# Altium PCB glasses_full_v1_small.PcbDoc (part 1 of 2)
Units mil, origin at the board's own origin, x right, y up, seen from the top; angles counter-clockwise.
Board outline 5946.88 x 2377.05 mil, 2 copper layers (Top Layer, Bottom Layer); 34 components, 50 nets, 179 pads, 116 vias.
Unrouted connection lines stored in the file: 2.
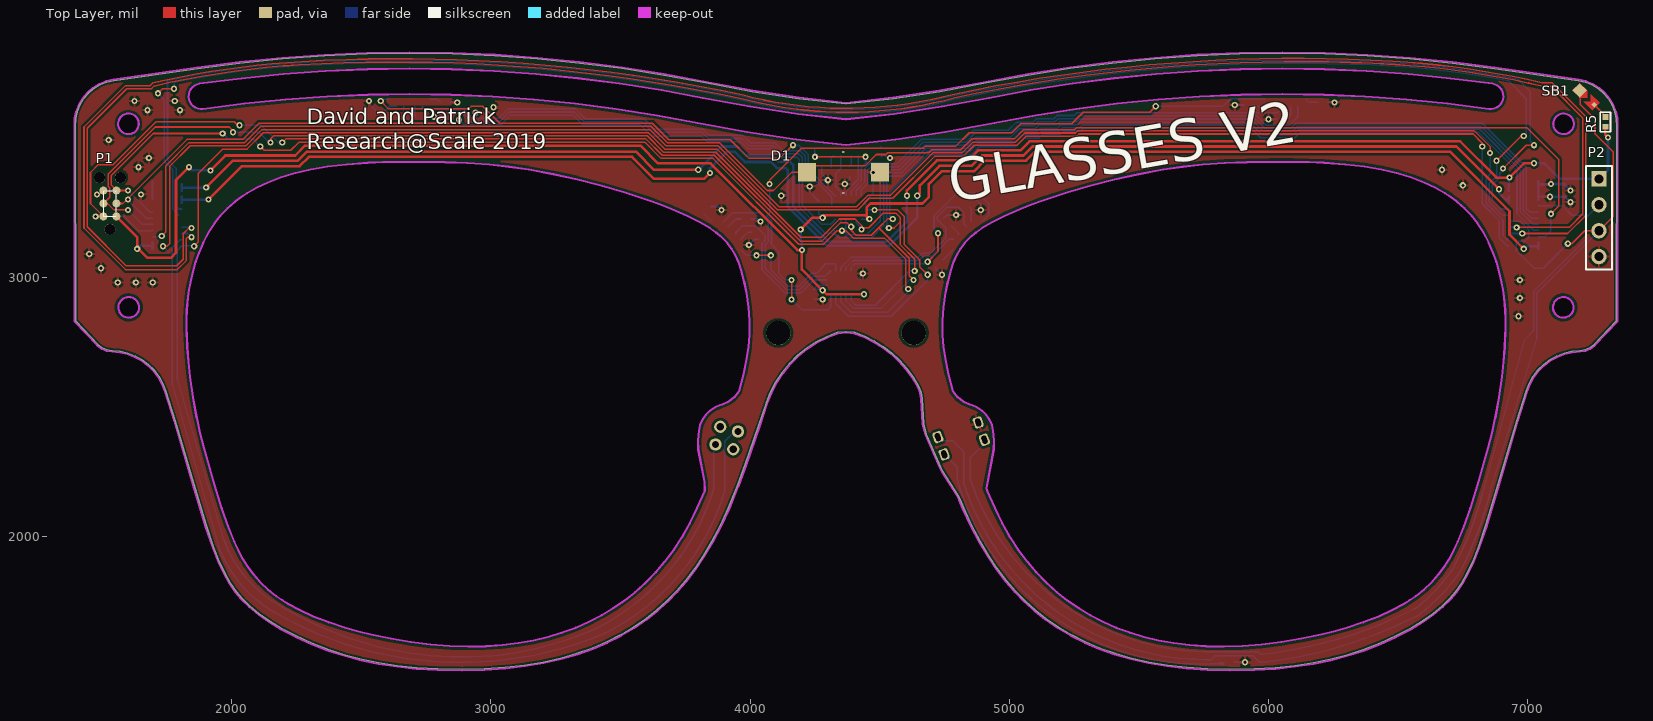
[diagram p0: Top Layer view]
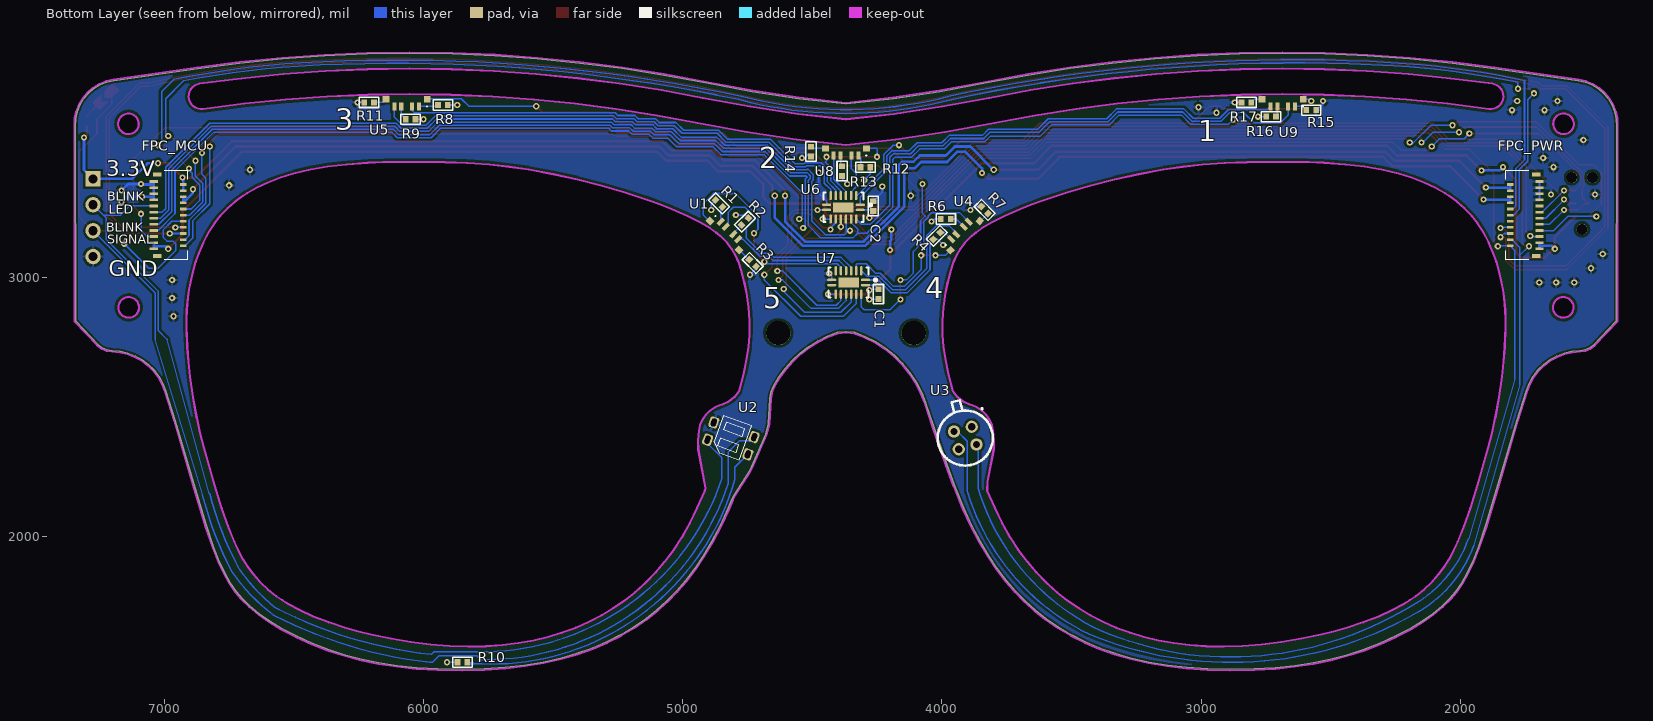
[diagram p1: Bottom Layer view, seen from below]
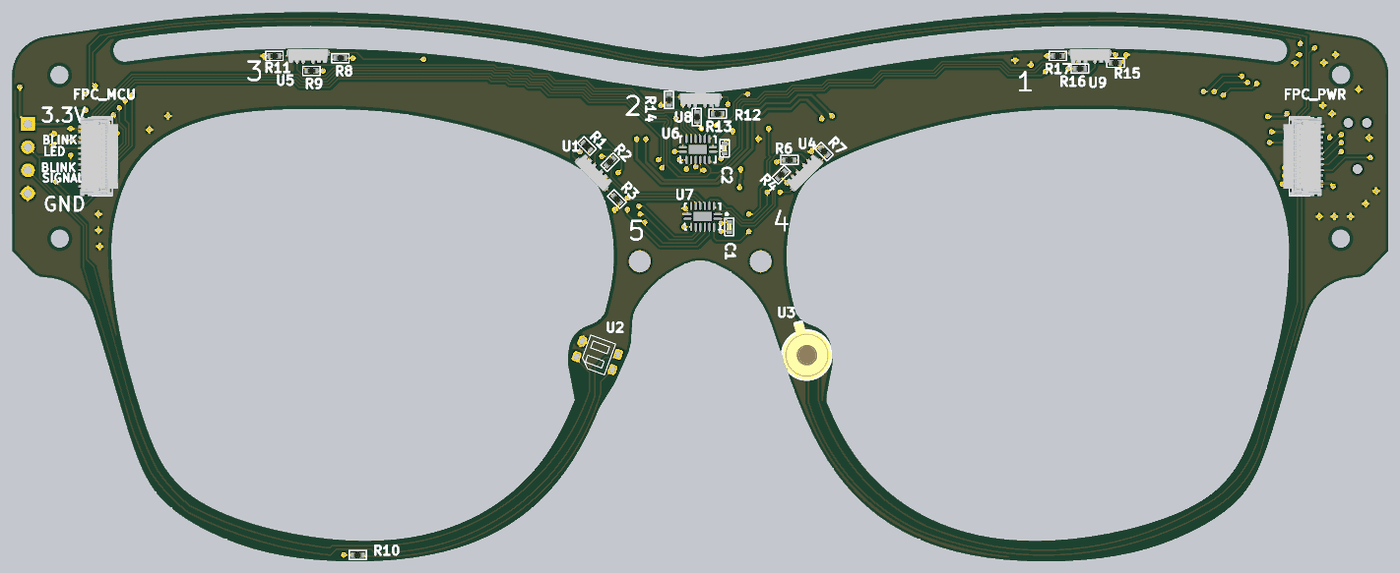
[diagram p3: 3D render of the assembled board from below, using the file's embedded part models]

## Layer stack, top to bottom
Top Solder: solder mask 0.4, Solder Resist, Dk 3.5
Top Layer: signal copper 1.4
Dielectric 1: dielectric 12.6, FR-4, Dk 4.8
Bottom Layer: signal copper 1.4
Bottom Solder: solder mask 0.4, Solder Resist, Dk 3.5

## Board outline
4669.9,2434.82 4679.73,2394.57 4736.2,2266.78 4744.2,2251.72 4801.12,2161.04 4810.39,2143.01 4823.78,2110.32 4855.98,2040.92 4888.05,1979.95 4920.73,1925.09 4954.19,1875.48 4988.54,1830.55 5024.15,1789.44 5061.73,1751.08 5101.06,1715.62 5141.96,1683.2 5189.62,1650.28 5240.15,1620.26 5293.21,1593.39 5348.39,1569.9 5407.37,1549.08 5470.39,1531 5537.7,1515.76 5608.98,1503.64 5684.52,1494.77 5765.01,1489.24 5851.41,1487.18 5945.19,1488.84 6027.03,1493.75 6102.3,1501.66 6172.6,1512.43 6238.36,1525.89 6300.02,1541.92 6365.01,1562.79 6429.36,1587.67 6492.87,1616.52 6546.87,1644.94 6593.39,1673.3 6634.26,1702.21 6670.5,1732.04 6699.72,1760.63 6722.62,1787.84 6745.54,1820.98 6767.03,1858.85 6787.62,1902.82 6808.73,1956.41 6838.86,2044.54 6881.55,2185.41 6957.86,2445.76 6994.14,2561.62 7005.36,2590.29 7020.44,2617.12 7039.09,2641.61 7060.96,2663.28 7085.61,2681.71 7112.58,2696.55 7141.35,2707.51 7171.36,2714.37 7202.02,2717.02 7221.96,2719.96 7240.46,2727.93 7256.3,2740.4 7342.25,2831.62 7343.44,3583.93 7342.03,3611.7 7336.17,3638.87 7325.99,3664.74 7311.78,3688.63 7293.89,3709.91 7272.81,3728.02 7249.08,3742.5 7223.33,3752.96 7196.22,3759.13 6872.6,3805.63 6709.64,3826.68 6546.14,3843.08 6382.25,3854.81 6218.08,3861.86 6053.78,3864.22 5889.48,3861.91 5725.32,3854.91 5561.41,3843.23 5397.91,3826.89 5234.95,3805.89 5072.64,3780.25 4911.13,3750 4731.71,3716.91 4551.26,3689.98 4370,3669.21 4188.74,3689.97 4008.29,3716.91 3828.86,3750 3667.36,3780.25 3505.05,3805.89 3342.08,3826.89 3178.58,3843.23 3014.68,3854.91 2850.52,3861.91 2686.22,3864.22 2521.92,3861.86 2357.75,3854.8 2193.86,3843.08 2030.36,3826.68 1867.4,3805.63 1543.77,3759.13 1516.67,3752.96 1490.92,3742.5 1467.19,3728.02 1446.1,3709.91 1428.22,3688.62 1414.01,3664.74 1403.83,3638.87 1397.97,3611.7 1396.56,3583.93 1397.75,2831.62 1483.7,2740.4 1499.53,2727.93 1518.04,2719.96 1537.97,2717.02 1568.64,2714.37 1598.65,2707.51 1627.42,2696.55 1654.39,2681.71 1679.04,2663.28 1700.91,2641.61 1719.56,2617.12 1734.64,2590.29 1745.86,2561.62 1782.14,2445.76 1858.45,2185.41 1901.14,2044.54 1931.27,1956.41 1952.37,1902.82 1972.97,1858.85 1994.46,1820.98 2017.38,1787.84 2040.28,1760.63 2069.5,1732.04 2105.74,1702.21 2146.61,1673.3 2193.13,1644.93 2247.13,1616.52 2310.64,1587.67 2374.99,1562.79 2439.98,1541.92 2501.64,1525.89 2567.39,1512.43 2637.7,1501.66 2712.97,1493.75 2794.81,1488.84 2888.59,1487.18 2974.99,1489.24 3055.48,1494.77 3131.02,1503.64 3202.3,1515.75 3269.61,1530.99 3332.63,1549.08 3391.61,1569.9 3446.79,1593.39 3499.85,1620.26 3550.37,1650.28 3598.04,1683.2 3638.94,1715.62 3678.27,1751.08 3715.85,1789.44 3751.46,1830.55 3785.81,1875.48 3819.27,1925.09 3851.95,1979.95 3884.02,2040.92 3916.22,2110.32 3950.71,2194.53 3982.01,2279.35 4031.79,2424.01 4061.99,2514.48 4078.33,2556.09 4098.9,2595.77 4123.48,2633.11 4151.81,2667.69 4183.57,2699.14 4218.42,2727.12 4255.99,2751.34 4295.88,2771.52 4337.64,2787.45 4370,2790.42 4402.36,2787.45 4441.17,2772.81 4478.39,2754.5 4513.67,2732.69 4546.68,2707.58 4577.12,2679.41 4604.7,2648.43 4629.17,2614.94 4650.3,2579.24 4659.56,2556.1 4663.76,2531.53
cut-out: 4911.65,2186.12 4911.74,2186.59 4940.11,2335.69 4941.44,2371.09 4937.3,2407.61 4932.62,2429.68 4923.83,2450.47 4911.25,2469.2 4895.34,2485.2 4876.67,2497.88 4855.93,2506.78 4847.52,2509.47 4822.32,2520.94 4800.48,2537.96 4783.21,2559.59 4765.92,2624.68 4753.67,2683.78 4746.8,2731.23 4743.07,2779.07 4742.9,2832.07 4746.54,2885.06 4754.23,2940.14 4762.66,2981.49 4773.41,3022.46 4785.5,3058.45 4796.84,3084.37 4810.73,3108.89 4828.79,3133.13 4849.82,3155.06 4871.58,3173.36 4894.65,3189.78 4931.11,3211.76 4981.93,3237.41 5042.9,3263.94 5086.21,3280.85 5129.94,3296.66 5221.99,3326.76 5315.14,3353.67 5406.49,3377.13 5498.51,3397.73 5594.11,3415.53 5669.84,3426.71 5745.84,3435.08 5831.3,3441.15 5917.14,3444.17 6003.06,3445.15 6096.91,3445.23 6155.48,3444.24 6213.97,3442.04 6296.23,3436.17 6369.88,3427.39 6435.6,3416.08 6468.68,3408.85 6501.59,3400.47 6551.51,3385.04 6600.17,3366.27 6642.89,3346.16 6681.08,3324.48 6703,3310 6724.16,3294.27 6755.43,3267.05 6783.87,3237.06 6806.93,3207.82 6829.69,3172.86 6849.83,3134.7 6867.09,3093.63 6878.99,3058.58 6889.1,3023.18 6899.84,2979.46 6905.25,2951.82 6909.38,2923.91 6913.62,2872.68 6914.56,2840.48 6914.53,2808.21 6911.66,2731.39 6907.42,2673.87 6901.52,2616.67 6890.08,2536.86 6874.97,2457.61 6861.75,2399.73 6847.13,2342.18 6812.74,2218.97 6778.66,2109.56 6752.68,2035.16 6730.43,1980.21 6709.47,1936.27 6695.98,1911.78 6681.18,1887.93 6656.32,1853.9 6628.4,1822.3 6600.55,1795.89 6567.44,1769.66 6545.21,1754.39 6522.26,1740.15 6477.87,1716.08 6425.47,1692.18 6366.19,1669.29 6298.9,1647.39 6251.16,1634.03 6203,1622.1 6126.5,1605.94 6049.38,1593.02 5973.45,1583.62 5899.06,1577.72 5827.94,1575.41 5759.39,1576.54 5695.43,1580.94 5634.28,1588.45 5575.97,1598.92 5519.41,1612.45 5465.33,1628.76 5413.39,1647.87 5359.6,1671.74 5312.6,1696.34 5267.4,1723.66 5224.4,1753.43 5183.93,1785.4 5140.79,1824.34 5104.18,1861.99 5070.03,1901.77 5035.86,1947.32 5003.48,1996.99 4972.93,2050.99 4944.18,2109.56 4914.87,2177.75
cut-out: 3884.07,2506.78 3863.33,2497.88 3844.66,2485.2 3828.75,2469.2 3816.17,2450.47 3807.38,2429.68 3802.7,2407.61 3798.56,2371.09 3799.89,2335.69 3823.59,2211.12 3825.13,2177.75 3795.82,2109.56 3767.07,2050.99 3736.52,1996.99 3704.14,1947.32 3669.97,1901.77 3635.82,1861.99 3599.21,1824.34 3556.07,1785.4 3515.6,1753.43 3472.6,1723.66 3427.4,1696.34 3380.4,1671.74 3326.61,1647.87 3274.67,1628.76 3220.59,1612.45 3164.03,1598.92 3105.72,1588.45 3044.57,1580.94 2980.61,1576.54 2912.06,1575.41 2840.93,1577.72 2766.55,1583.62 2690.62,1593.02 2613.5,1605.94 2537,1622.1 2488.84,1634.03 2441.1,1647.39 2373.81,1669.29 2314.52,1692.18 2262.13,1716.08 2217.74,1740.15 2194.79,1754.39 2172.56,1769.66 2139.45,1795.89 2111.6,1822.3 2083.68,1853.9 2058.82,1887.93 2044.02,1911.78 2030.53,1936.27 2009.57,1980.21 1987.32,2035.16 1961.34,2109.56 1927.26,2218.97 1892.87,2342.18 1878.24,2399.73 1865.03,2457.61 1849.92,2536.86 1838.48,2616.67 1832.58,2673.87 1828.34,2731.39 1825.47,2808.21 1825.44,2840.48 1826.37,2872.68 1830.62,2923.91 1834.75,2951.82 1840.16,2979.46 1850.9,3023.18 1861.01,3058.58 1872.91,3093.63 1890.17,3134.7 1910.31,3172.86 1933.07,3207.82 1956.12,3237.06 1984.57,3267.05 2015.84,3294.27 2036.99,3310 2058.92,3324.48 2097.11,3346.16 2139.83,3366.27 2188.49,3385.04 2238.41,3400.47 2271.31,3408.85 2304.4,3416.08 2370.12,3427.39 2443.76,3436.17 2526.03,3442.04 2584.52,3444.24 2643.09,3445.23 2736.94,3445.15 2822.86,3444.17 2908.7,3441.15 2994.16,3435.08 3070.15,3426.71 3145.89,3415.53 3241.49,3397.73 3333.51,3377.13 3424.86,3353.67 3518.01,3326.76 3610.06,3296.66 3653.79,3280.85 3697.1,3263.94 3758.07,3237.41 3808.89,3211.76 3845.35,3189.78 3868.42,3173.36 3890.18,3155.06 3911.21,3133.13 3929.27,3108.89 3943.16,3084.37 3954.5,3058.45 3966.58,3022.46 3977.34,2981.49 3985.77,2940.14 3993.46,2885.06 3997.09,2832.07 3996.92,2779.07 3993.2,2731.23 3986.33,2683.78 3974.08,2624.68 3956.79,2559.59 3939.52,2537.96 3917.68,2520.94 3892.48,2509.47
cut-out: 1601.46,3632.05 1607.73,3631.55 1613.86,3630.06 1619.66,3627.62 1625.01,3624.29 1629.77,3620.16 1633.82,3615.34 1637.05,3609.93 1639.39,3604.08 1640.77,3597.94 1641.17,3591.65 1640.57,3585.38 1638.99,3579.28 1636.46,3573.51 1633.06,3568.21 1628.86,3563.52 1623.97,3559.54 1618.51,3556.39 1612.63,3554.14 1606.47,3552.85 1600.17,3552.55 1593.91,3553.24 1587.84,3554.91 1582.11,3557.53 1576.86,3561.01 1572.23,3565.28 1568.33,3570.23 1565.26,3575.73 1563.1,3581.65 1561.9,3587.83 1561.69,3594.13 1562.48,3600.38 1564.24,3606.42 1566.94,3612.12 1570.51,3617.31 1574.85,3621.88 1579.85,3625.7 1585.4,3628.69 1591.35,3630.76 1594.89,3631.52 1598.49,3631.95 1599.81,3632.02 1600.63,3632.05
cut-out: 1602.53,2923.81 1608.81,2923.31 1614.93,2921.83 1620.74,2919.39 1626.09,2916.07 1630.85,2911.95 1634.9,2907.13 1638.14,2901.72 1640.49,2895.88 1641.88,2889.73 1642.28,2883.45 1641.69,2877.18 1640.11,2871.08 1637.59,2865.3 1634.19,2860 1630,2855.3 1625.11,2851.32 1619.66,2848.17 1613.78,2845.91 1607.62,2844.61 1601.33,2844.3 1595.06,2844.99 1588.99,2846.66 1583.26,2849.26 1578,2852.74 1573.37,2857.01 1569.46,2861.95 1566.39,2867.45 1564.22,2873.36 1563.02,2879.55 1562.8,2885.84 1563.58,2892.09 1565.34,2898.14 1568.03,2903.84 1571.59,2909.03 1575.93,2913.61 1580.93,2917.43 1586.47,2920.43 1592.42,2922.51 1595.98,2923.27 1599.6,2923.7 1600.9,2923.78 1601.71,2923.8
cut-out: 7138.42,3552.53 7132.14,3553.05 7126.03,3554.56 7120.23,3557.02 7114.89,3560.36 7110.14,3564.5 7106.11,3569.34 7102.9,3574.76 7100.58,3580.62 7099.21,3586.76 7098.83,3593.05 7099.45,3599.32 7101.05,3605.41 7103.59,3611.18 7107.02,3616.47 7111.23,3621.15 7116.13,3625.11 7121.59,3628.24 7127.48,3630.47 7133.65,3631.75 7137.57,3632.04 7141.5,3631.95 7147.73,3630.99 7153.73,3629.06 7159.34,3626.21 7164.44,3622.5 7168.89,3618.04 7172.57,3612.93 7175.41,3607.31 7177.32,3601.3 7178.25,3595.08 7178.19,3588.78 7177.14,3582.57 7175.12,3576.6 7172.19,3571.03 7168.41,3565.99 7163.88,3561.61 7158.72,3558 7153.05,3555.25 7147.02,3553.43 7142.74,3552.75
cut-out: 7137.47,2923.81 7143.75,2923.31 7149.87,2921.83 7155.68,2919.4 7161.04,2916.08 7165.8,2911.95 7169.85,2907.13 7173.09,2901.73 7175.44,2895.88 7176.83,2889.74 7177.23,2883.45 7176.64,2877.18 7175.07,2871.08 7172.55,2865.31 7169.15,2860.01 7164.95,2855.31 7160.07,2851.33 7154.62,2848.17 7148.74,2845.91 7142.57,2844.61 7138.57,2844.3 7134.56,2844.39 7128.33,2845.35 7122.33,2847.28 7116.72,2850.13 7111.62,2853.84 7107.18,2858.3 7103.49,2863.41 7100.66,2869.03 7098.75,2875.03 7097.81,2881.26 7097.87,2887.56 7098.92,2893.77 7100.94,2899.74 7103.88,2905.31 7107.65,2910.35 7112.18,2914.73 7117.35,2918.34 7123.01,2921.09 7129.04,2922.91 7133.23,2923.58
cut-out: 4370,3511.01 4178.27,3532.52 3987.42,3560.74 3797.67,3595.64 3640.57,3625.07 3482.7,3650 3324.19,3670.43 3165.15,3686.32 3005.73,3697.68 2846.05,3704.49 2686.24,3706.74 2526.43,3704.44 2366.75,3697.58 2207.33,3686.17 2048.31,3670.23 1889.8,3649.75 1879.52,3649.36 1869.38,3651.12 1859.83,3654.94 1851.28,3660.67 1844.11,3668.05 1838.63,3676.75 1835.08,3686.41 1833.62,3696.6 1834.31,3706.86 1837.11,3716.76 1841.91,3725.86 1848.5,3733.76 1856.59,3740.12 1865.82,3744.66 1875.8,3747.18 2037.09,3768.01 2198.91,3784.24 2361.13,3795.85 2523.61,3802.82 2686.23,3805.17 2848.84,3802.88 3011.33,3795.95 3173.55,3784.39 3335.37,3768.21 3496.67,3747.43 3657.31,3722.06 3817.17,3692.11 4000.46,3658.35 4184.81,3630.93 4370,3609.88 4555.19,3630.93 4739.54,3658.35 4922.83,3692.11 5082.69,3722.06 5243.33,3747.43 5404.63,3768.21 5566.45,3784.39 5728.67,3795.95 5891.16,3802.88 6053.77,3805.17 6216.39,3802.83 6378.87,3795.85 6541.09,3784.24 6702.91,3768.01 6864.2,3747.18 6874.18,3744.66 6883.41,3740.12 6891.5,3733.76 6898.09,3725.86 6902.89,3716.76 6905.69,3706.86 6906.38,3696.6 6904.92,3686.41 6901.37,3676.76 6895.89,3668.05 6888.72,3660.67 6880.17,3654.94 6870.62,3651.12 6860.48,3649.36 6850.2,3649.75 6691.69,3670.23 6532.66,3686.17 6373.25,3697.58 6213.57,3704.44 6053.76,3706.74 5893.95,3704.49 5734.27,3697.68 5574.84,3686.32 5415.81,3670.43 5257.29,3650 5099.43,3625.07 4942.33,3595.64 4752.58,3560.74 4561.73,3532.52

## Design rules (kind name [scope] priority, off if disabled: settings)
Clearance [All] p1: gap=10 ignorepadtopadclearanceinfootprint=FALSE except(0: Arc-Hole Track-Hole SMDPad-Hole THPad-Hole Via-Hole Fill-Hole Poly-Hole Region-Hole Text-Hole; 6: Arc-Arc Arc-Track Arc-SMDPad Arc-THPad Arc-Via Arc-Fill Track-Track Track-SMDPad Track-THPad Track-Via Track-Fill SMDPad-SMDPad SMDPad-THPad SMDPad-Via SMDPad-Fill THPad-Via THPad-Fill Via-Via Via-Fill Fill-Fill)
PolygonConnect [All] p1: connectstyle=Relief reliefconductorwidth=10 reliefentries=4 polygonreliefangle="90 Angle" airgapwidth=10
RoutingVias [All] p1: holewidth=28 width=50 viastyle="Through Hole" minholewidth=28 minwidth=50 maxholewidth=28 maxwidth=50
SolderMaskExpansion [All] p1: expansion=4
Width [All] p1: maxlimit=12 minlimit=6 preferedwidth=10
30 further rules are at their usual default settings.

## Components (designator, comment, footprint, x,y, rotation, side; value= is the part's Value field where it differs from the comment)
C1 "1µF" 0402C 4245,2935 r270 bottom
C2 "1µF" 0402C 4265,3275 r90 bottom
D1 "VBPW34FASR" VBPW34FAS 4360,3405 r0 top
FPC_MCU "502250-2391" 5022502391 6980,3240 r270 bottom
FPC_PWR "502250-2391" 5022502391 1755,3240 r90 bottom
P1 "Header 3X2" HEADER_PROGRAM_STLINK_SWD 1555,3235 r90 top
P2 "Header 4" HDR1X4 7275,3380 r270 top
R1 "100" 0402R 4860,3285 r45 bottom
R2 "100" 0402R 4760,3215 r135 bottom
R3 "100" 0402R 4730,3055 r225 bottom
R4 "100" 0402R 4020,3160 r315 bottom
R5 "50K" 0402R 7300,3600 r270 top
R6 "100" 0402R 3985,3225 r0 bottom
R7 "100" 0402R 3835,3260 r45 bottom
R8 "100" 0402R 5925,3665 r180 bottom
R9 "100" 0402R 6050,3610 r180 bottom
R10 "100" 0402R 5850,1515 r0 bottom
R11 "100" 0402R 6210,3675 r0 bottom
R12 "100" 0402R 4295,3425 r180 bottom
R13 "100" 0402R 4385,3410 r270 bottom
R14 "100" 0402R 4505,3485 r270 bottom
R15 "100" 0402R 2575,3645 r0 bottom
R16 "100" 0402R 2730,3620 r180 bottom
R17 "100" 0402R 2825,3675 r180 bottom
SB1 "SOLDER_JUMPER" SMD_JUMPER 7230,3720 r315 top
U1 "QLS6B-FKW" QLS6B-FKW 4805,3195 r45 bottom
U2 "QRE1113" QRE1113_DIP 4880,2440 r290 bottom
U3 "ZTP-135SR" ZTP-135SR 3910,2380 r210 bottom
U4 "QLS6B-FKW" QLS6B-FKW 3943.67,3194.16 r315 bottom
U5 "QLS6B-FKW" QLS6B-FKW 6065,3640 r180 bottom
U6 "74HC595BQ,115" "74VHC595 - QFN127P600-8N" 4380,3270 r270 bottom
U7 "74HC595BQ,115" "74VHC595 - QFN127P600-8N" 4360,2980 r270 bottom
U8 "QLS6B-FKW" QLS6B-FKW 4370,3450 r180 bottom
U9 "QLS6B-FKW" QLS6B-FKW 2685,3640 r180 bottom

## Footprints (in the part's own frame and the unit in brackets; to place one, negate y for a bottom-side part, rotate by r counter-clockwise, add the part's x,y. Pads: shape width x height; smd on the part's side, far side on the other; paste and mask are expansions set on the pad)
"74VHC595 - QFN127P600-8N" [mm]
  oval 0.25x0.9 smd: 1(-0.25,1.65) 8(-0.25,-1.65) 9(0.25,-1.65) 16(0.25,1.65)
  oval 0.9x0.25 smd: 2(-1.15,1.25) 3(-1.15,0.75) 4(-1.15,0.25) 5(-1.15,-0.25) 6(-1.15,-0.75) 7(-1.15,-1.25) 10(1.15,-1.25) 11(1.15,-0.75) 12(1.15,-0.25) 13(1.15,0.25) 14(1.15,0.75) 15(1.15,1.25)
  rect 1x2 smd: 17(0,0)
  silkscreen extent -1.45,-1.95 1.45,2.77, body extent -1.3,-1.8 1.3,1.8, height 1
0402C [mm]
  rect 0.559x0.6 smd: 1(-0.48,0) 2(0.48,0)
  silkscreen extent -0.95,-0.5 0.95,0.5, body extent -0.48,-0.25 0.48,0.25, height 0.5
0402R [mm]
  rect 0.559x0.6 smd: 1(-0.48,0) 2(0.48,0)
  silkscreen extent -0.95,-0.5 0.95,0.5, body extent -0.46,-0.25 0.5,0.25, height 0.3
5022502391 [mm]
  rect 0.26x0.8 smd: 1(-3.3,-1.545) 3(-2.7,-1.545) 5(-2.1,-1.545) 7(-1.5,-1.545) 9(-0.9,-1.545) 11(-0.3,-1.545) 13(0.3,-1.545) 15(0.9,-1.545) 17(1.5,-1.545) 19(2.1,-1.545) 21(2.7,-1.545) 23(3.3,-1.545)
  rect 0.26x0.65 smd: 2(-3,1.33) 4(-2.4,1.33) 6(-1.8,1.33) 8(-1.2,1.33) 10(-0.6,1.33) 12(0,1.33) 14(0.6,1.33) 16(1.2,1.33) 18(1.8,1.33) 20(2.4,1.33) 22(3,1.33)
  rect 0.4x0.85 smd: MP1(-4,-1.22) MP2(4,-1.22)
  silkscreen extent -4.35,-0.5 4.35,1.77, body extent -4.35,-1.76 4.35,2.43, height 0.9
HDR1X4 [mm] "Connector; Header; 4 Position"
  rect 1.5x1.5 hole 0.9: 1(0,0)
  round 1.5 hole 0.9: 2(2.54,0) 3(5.08,0) 4(7.62,0)
  silkscreen extent -1.27,-1.27 8.89,1.27
HEADER_PROGRAM_STLINK_SWD [mm]
  round 0.787 smd: 1(0,0) 2(0,1.27) 3(1.27,0) 4(1.27,1.27) 5(2.54,0) 6(2.54,1.27)
  round 1.08 hole 1.08 unplated: HOLE(-1.27,0.635) HOLE(3.81,-0.381) HOLE(3.81,1.651)
  silkscreen extent 0,0 2.54,1.27
QLS6B-FKW [mm] "CREE RBG LED RIGHT ANGLE"
  rect 0.66x0.6 smd: 1(2.02,1.2) 6(-2.02,1.2)
  rect 0.4x0.8 smd: 2(1.21,0.5) 3(0.53,0.5) 4(-0.53,0.5) 5(-1.21,0.5)
  silkscreen extent 1.98,0.49 1.99,0.49, body extent -2.35,0.11 2.35,1.61, height 1.3
QRE1113_DIP [mm] "QRE1113 IR PHOTODIODE/TRANSISTOR PAIR"
  rrect50% 1.1x0.9 hole 0.5 slot 0.8 at 0 deg: 1(1.8,0) 2(1.8,4.2) 3(0,4.2) 4(0,0)
  silkscreen extent -0.96,0.65 2.64,3.55
SMD_JUMPER [mm]
  rect 1x1 smd: 1(-0.536,-0.5)
  rect 0.4x0.4 smd: 2(1.45,-0.494)
  Top Layer region: -1.061,0.01 -0.01,0.01 0.5,-0.5 0.01,-0.992 -1.061,-0.992
  Top Layer region: 1.012,-0.494 0.504,0.01 1.7,0.01 1.7,-1.005 0.5,-1.005
VBPW34FAS [mm] "IR Photodiode SMD (Vive)"
  rect 1.75x1.8 smd: 1(-3.575,0) 2(3.575,0)
  silkscreen extent -2.65,-2 0.08,2, body extent -3.29,-1.95 3.11,1.95, height 1.48
ZTP-135SR [mm]
  round 1.2 hole 0.7: 1(0,1.27) 2(1.27,0) 3(0,-1.27) 4(-1.27,0)
  silkscreen extent -2.9,-2.7 2.7,3.35, body extent -4.43,-3.77 3.8,4.46, height 3.4

## Part data
C1 C2: library part GCM155C71A105KE38D, "CAP CER 1UF 10V X7S 0402"
D1: "Diode"
FPC_MCU FPC_PWR: "Connector"
P1: "Header, 3-Pin, Dual row"
P2: "Header, 4-Pin"
R1 R2 R3 R4 R5 R6 R7 R8 R9 R10 R11 R12 R13 R14 R15 R16 R17: library part Resistor
U1 U4 U5 U8 U9: "CREE RGB LED"
U2: "IR Emitter and Receiver"
U3: "Undefined or Miscellaneous"
U6 U7: library part 74HC595

## Free pads (board coordinates)
  round 94.49 hole 94.49: 1(4108.73,2785.37) 1(4631.26,2785.37)

## Via types
v1: diameter 24, hole 12, Top Layer to Bottom Layer, 116 vias

## Nets (pads, with @x,y where several pads share a name; then routed paths per layer and width w, separated by ;. In a path a pad name is that pad's centre, name@x,y a point inside that pad or via, vN(x,y) a via of type N, cw(c..) or ccw(c..) an arc to the next point about the centre after c; other vN are vias at no path point)
3.3V: FPC_MCU.2 FPC_MCU.4 FPC_PWR.20 FPC_PWR.22 P2.1 R5.2 | length 6468.1
  Top Layer w10: v1(1901.3,3346.3) 2005,3450 2255,3450 2290,3485 3560,3485 3630,3415 v1(3800,3415) ; v1(4605,3315) 4605,3335 4721,3451 4841,3451 4880,3490 5042.37,3490 5077.37,3525 6740,3525 6880,3385 v1(6930,3385) 6985,3440 v1(7025,3440) ; R5.2@7300,3581.1 7300,3550 v1(7310,3540)
  Bottom Layer w10: FPC_PWR.20@1807.36,3334.49 1807.36,3346.3 ; FPC_PWR.22@1807.36,3358.11 1807.36,3346.3 ; v1(1901.3,3346.3) 1807.36,3346.3 ; v1(3800,3415) 3890,3505 3950,3505 3985,3470 4085,3470 4109,3446 4154,3446 4166,3434 4166,3274.2 4302.2,3138 4528,3138 4605,3215 v1(4605,3315) ; FPC_MCU.4@6927.64,3334.49 FPC_MCU.2@6927.64,3358.11 6927.64,3382.64 v1(6930,3385) ; v1(7025,3440) 7065,3440 7125,3380 P2.1@7275,3380 7310,3415 v1(7310,3540)
5V: FPC_MCU.6 FPC_MCU.8 FPC_PWR.16 FPC_PWR.18 | length 5878.8
  Top Layer w10: v1(1910,3300) 2039,3429 2261.63,3429 2297.63,3465 3545,3465 3630,3380 3822.63,3380 v1(3845,3402.37) ; v1(4645,3315) 4655,3325 4655,3355 4730,3430 4855,3430 4895,3470 5055,3470 5090,3505 6725,3505 v1(6890,3340)
  Bottom Layer w10: FPC_PWR.16@1807.36,3287.24 1807.36,3300 ; FPC_PWR.18@1807.36,3310.87 1807.36,3300 ; v1(1910,3300) 1807.36,3300 ; v1(3845,3402.37) 3845,3420 3910,3485 3940,3485 3980,3445 4080,3445 4104,3421 4139,3421 4145,3415 4145,3272.57 4295.57,3122 4537,3122 4645,3230 v1(4645,3315) ; v1(6890,3340) 6890,3325 6915.94,3299.06 6927.64,3299.06 ; FPC_MCU.8@6927.64,3287.24 6927.64,3299.06 ; FPC_MCU.6@6927.64,3310.87 6927.64,3299.06
ANALOG_EXP_CONN: FPC_MCU.10 FPC_PWR.14 | length 6492.8
  Top Layer w6: v1(6905,3420) 6995,3510 v1(7025,3510)
  Bottom Layer w5.91: 1749.12,3759.12 cw(c2459.8,433.88) 2265.9,3828.68 ; 2265.87,3828.68 cw(c2640.62,-2505.23) 3965.02,3700 ccw(c4372.5,5242.5) 4775.33,3698.77 ; 4775.32,3698.77 cw(c6099.72,-2506.45) 6474.47,3827.46 cw(c6280.57,432.65) 6963.72,3763.66 ccw(c6280.57,432.65) 6905.48,3775.07
  Bottom Layer w6: 1750,3759.12 1752,3757.12 1752,3453 1785,3420 1785,3275 1796.38,3263.62 FPC_PWR.14@1807.36,3263.62 ; v1(6905,3420) 6905,3415 6892,3402 6892,3385.03 6864,3357.03 6864,3296 6896.38,3263.62 FPC_MCU.10@6927.64,3263.62 ; 6963.72,3763.66 7010,3717.37 7010,3525 v1(7025,3510)
BLINK_PWM: FPC_MCU.9 FPC_PWR.15 P2.2 U2.1 | length 4205.6
  Bottom Layer w3.94: 6827.03,2165.65 6989.51,2760.13
  Bottom Layer w5.91: 4848.73,2222.89 ccw(c5777.51,2534.72) 5750.01,1555.38 ; 5970,1545 ccw(c5782.5,3262.5) 6574.49,1727.01 ccw(c6120.75,2281.26) 6715.91,1882.69 ccw(c5476.8,2525.89) 6825.72,2166.01
  Bottom Layer w6: 4848.73,2222.89 4848.73,2303.73 4904.24,2359.24 U2.1@4904.24,2373.41 ; 5750.01,1555.38 5959.62,1555.38 5970,1545 ; 6989.51,2760.13 7023,2793.62 7023,2944.97 7225,3146.97 7225,3230 P2.2@7275,3280 ; FPC_MCU.9@7040.83,3275.43 7134.57,3275.43 7170,3240 7235,3240
BLINK_SIG: FPC_MCU.14 FPC_PWR.10 P2.3 SB1.1 U2.3 | length 5272.4
  Top Layer w6: v1(7155,3130) 7170,3130 7220,3180 P2.3@7275,3180 7330,3235 7330,3483.98 7260,3553.98 7260,3610 7202.32,3667.68 7202.32,3719.85 SB1.1@7201.17,3720.99
  Bottom Layer w3.94: 6852.66,2160.99 7035,2760
  Bottom Layer w5.91: 4824.78,2204.93 ccw(c5757.51,2504.72) 5754.99,1525 ; 5975,1515 ccw(c5787.5,3232.5) 6579.49,1697.01 ccw(c6147.64,2268.48) 6739.43,1864.93 ; 6739.46,1864.91 ccw(c5501.8,2510.89) 6853.3,2160.82
  Bottom Layer w6: U2.3@4724.62,2383.45 4738.06,2370 4780,2370 4825,2325 4825,2204.93 ; 5754.99,1525 5780,1525 5795,1540 5940,1540 5965,1515 5975,1515 ; FPC_MCU.14@6927.64,3216.38 6971.65,3216.38 7005,3183.03 7005,3155 6990,3140 6967.09,3140 6956.48,3129.39 6956.48,3103.52 7025,3035 7060,3035 v1(7155,3130) ; 7035,2760 7035,2940 P2.3@7275,3180
GND: C1.2 C2.2 D1.2 FPC_MCU.1 FPC_MCU.3 FPC_MCU.5 FPC_MCU.7 FPC_PWR.17 FPC_PWR.19 FPC_PWR.21 FPC_PWR.23 P1.6 P2.4 R1.2 R2.2 R3.2 R4.2 R6.2 R7.2 R8.2 R9.2 R10.2 R11.2 R12.2 R13.2 R14.2 R15.1 R16.1 R17.1 U2.4 U6.8 U7.8 | length 1373.6
  Top Layer w6: v1(1480,3320) 1490,3320 P1.6@1505,3335
  Bottom Layer w6: FPC_PWR.17@1694.17,3299.06 FPC_PWR.19@1694.17,3322.68 FPC_PWR.21@1694.17,3346.3 FPC_PWR.23@1694.17,3369.92 ; v1(2530,3680) 2530,3670 2555,3645 R15.1@2556.1,3645 ; R16.1@2748.9,3620 v1(2780,3620) ; R17.1@2843.9,3675 v1(2870,3675) ; R7.2@3848.36,3273.36 3876.64,3273.36 v1(3890,3260) ; v1(3995,3125) 4016.64,3146.64 R4.2@4033.36,3146.64 ; R6.2@4003.9,3225 4030,3225 v1(4040,3215) ; v1(4230,3350) 4230,3328.9 C2.2@4265,3293.9 ; C1.2@4245,2916.1 v1@4278.9,2916.1 ; R12.2@4276.1,3425 4276.1,3398.9 v1(4300,3375) ; v1(4365,3360) 4385,3380 R13.2@4385,3391.1 ; U7.8@4424.96,2989.84 4424.96,3004.96 v1(4435,3015) ; U6.8@4444.96,3279.84 4444.96,3294.96 4475,3325 v1(4475,3405) ; R14.2@4506.1,3465 4516.1,3475 4531.1,3460 v1(4540,3460) ; R3.2@4716.64,3041.64 4716.64,3033.36 v1(4740,3010) ; R2.2@4746.64,3228.36 4758.27,3240 v1(4795,3240) ; R1.2@4873.36,3298.36 4890,3281.73 v1(4890,3260) ; R10.2@5868.9,1515 v1@5915,1515 ; v1(5870,3665) R8.2@5906.1,3665 ; v1(6000,3610) R9.2@6031.1,3610 ; R11.2@6228.9,3675 v1(6255,3675)
  Bottom Layer w10: FPC_MCU.7@7040.83,3299.06 7040.83,3310.87 ; FPC_MCU.1@7040.83,3369.92 7040.83,3358.11 ; v1(7165,3290) 7144.13,3310.87 v1(7085.87,3310.87) 7040.83,3310.87 ; v1(7165,3335) 7140,3360 v1(7090,3360) 7088.11,3358.11 7040.83,3358.11 ; 7040.83,3310.87 FPC_MCU.5@7040.83,3322.68 FPC_MCU.3@7040.83,3346.3 7040.83,3358.11
  other v1: 5910,1515 6965,2850 4280,2915 6970,2920 1560,2980 1630,2980 1695,2980 6970,2990 1495,3035 1450,3090 4120,3315 1650,3320 6750,3355 6670,3415 1640,3425 1680,3460 1525,3530 2940,3635 1675,3645 1800,3645 3010,3656.44 1625,3680 1780,3680
I2C1_SCL: FPC_MCU.18 FPC_PWR.6 | length 7780
  Top Layer w5.91: 3969.67,3703.77 ccw(c4372.5,5247.5) 4779.99,3705 cw(c6104.38,-2500.23) 6479.13,3833.68 ; 3969.68,3703.77 ccw(c2645.28,-2501.45) 2270.53,3832.46 ccw(c2464.43,437.65) 1695.54,3749.91 ; 6479.1,3833.68 cw(c6285.2,438.88) 7054.09,3751.14 ; 1695.54,3749.91 cw(c2464.43,437.65) 1741.86,3760.33 ccw(c2464.43,437.65) 1695.54,3749.91
  Top Layer w6: 1695.54,3749.91 1685.62,3740 1590,3740 1430,3580 1430,3190 1590,3030 1790,3030 1825,3065 1825,3150 1830,3155 v1(1845,3155) ; v1(6979.13,3169.13) 7154.13,3169.13 7225,3240 7225,3620 7093.73,3751.27 7054.09,3751.27
  Bottom Layer w6: FPC_PWR.6@1807.36,3169.13 1830.87,3169.13 v1(1845,3155) ; FPC_MCU.18@6927.64,3169.13 v1(6979.13,3169.13)
I2C1_SDA: FPC_MCU.16 FPC_PWR.8 | length 7770.1
  Top Layer w5.91: 6488.4,3821.18 cw(c6280.4,427.21) 7059.85,3737 ccw(c6280.4,427.21) 7001.96,3750.1 ; 6488.45,3821.17 ccw(c6113.7,-2512.73) 4789.31,3692.49 cw(c4372.5,5232.5) 3960.33,3691.24 ccw(c2635.94,-2513.98) 2261.19,3819.92 ccw(c2469.19,425.96) 1700.29,3738.22 ; 1700.29,3738.22 cw(c2469.19,425.96) 1732.81,3745.6 ; 1700.29,3738.22 cw(c2469.19,425.96) 1732.81,3745.6 ; 1700.29,3738.22 cw(c2469.19,425.96) 1732.81,3745.6
  Top Layer w6: 1700.22,3738.22 1690,3728 1594.97,3728 1442,3575.03 1442,3194.97 1591.97,3045 1788.03,3045 1813,3069.97 1813,3168 1835,3190 v1(1845,3190) ; v1(6957.76,3192.76) 7160.79,3192.76 7213,3244.97 7213,3615.03 7091.03,3737 7059.85,3737
  Bottom Layer w6: FPC_PWR.8@1807.36,3192.76 1842.24,3192.76 v1(1845,3190) ; FPC_MCU.16@6927.64,3192.76 v1(6957.76,3192.76)
LED_1_B: U6.2 U9.1 | length 2025.5
  Top Layer w6: v1(2575,3680) 2605,3650 2913.74,3650 2923.74,3660 2968.74,3660 3033.74,3595 3621.97,3595 3685.97,3531 3922.94,3531 3993.94,3460 4115,3460 v1(4165,3510)
  Bottom Layer w6: v1(2575,3680) 2575,3685 2577.24,3687.24 U9.1@2605.47,3687.24 ; v1(4165,3510) 4187.94,3510 4225,3472.94 4225,3417.47 4327.2,3315.28 U6.2@4330.79,3315.28
LED_1_G: U6.1 U9.5 | length 1820
  Bottom Layer w6: U9.5@2732.64,3659.68 2745.32,3647 2894.97,3647 2927.97,3614 3030.06,3614 3066.06,3650 3326.23,3650 3364.16,3612.07 3590,3612.07 3631.06,3571.01 3820,3571.01 3843.27,3547.74 3972.26,3547.74 4000.48,3519.52 4095,3519.52 4125.52,3489 4191.97,3489 4213,3467.97 4213,3412.5 4217.9,3407.6 4247.6,3377.9 4315.04,3310.46 U6.1@4315.04,3279.84
LED_1_R: U6.15 U9.3 | length 2051.9
  Bottom Layer w6: U9.3@2664.13,3659.68 2664.13,3625.87 2693,3597 2797,3597 2835,3635 2890,3635 2923,3602 3035.03,3602 3071.03,3638 3321.26,3638 3359.19,3600.07 3585.03,3600.07 3626.09,3559.01 3815.03,3559.01 3838.29,3535.74 3967.29,3535.74 3995.51,3507.52 4090.03,3507.52 4120.55,3477 4187,3477 4201,3463 4201,3279.3 4275.3,3205 4311.06,3205 U6.15@4330.79,3224.72
LED_2_B: U6.5 U8.1 | length 439.9
  Top Layer w6: v1(4250,3465) 4405,3465 v1(4445,3465)
  Bottom Layer w6: v1(4250,3465) 4250,3495 ; 4252.24,3497.24 U8.1@4290.47,3497.24 ; U6.5@4389.84,3315.28 4389.84,3333.48 4429.64,3373.28 4429.64,3424.64 4450,3445 4445,3450 v1(4445,3465)
LED_2_G: U6.4 U8.5 | length 174.1
  Bottom Layer w6: U6.4@4370.16,3315.28 4370.16,3330.77 4417.64,3378.25 U8.5@4417.64,3469.68
LED_2_R: U6.3 U8.3 | length 170.4
  Bottom Layer w6: U8.3@4349.13,3469.68 4349.13,3419.13 4330.47,3400.47 4330.47,3349.53 4350.47,3329.53 U6.3@4350.47,3315.28
LED_3_B: U5.1 U7.15 | length 2779.3
  Top Layer w6: v1(4075,3360) 4075,3375 4198.01,3498.01 4668.01,3498.01 4675,3505 4792.12,3505 4845.12,3558 5010.12,3558 5045.12,3593 5241,3593 5285,3637 5542,3637 v1(5565,3660) ; v1(4160,2915) v1(4160,2990)
  Bottom Layer w6: v1(4075,3360) 4075,3246.67 4065,3236.67 4082.49,3219.18 4082.49,3127.51 4110,3100 4110,3016.97 4136.97,2990 v1(4160,2990) ; v1(4160,2915) 4200,2875 4300,2875 4310.79,2885.79 U7.15@4310.79,2934.72 ; v1(5565,3660) 5825,3660 5854.38,3689.38 5983.33,3689.38 U5.1@5985.47,3687.24
LED_3_G: U5.5 U6.7 | length 1925.8
  Bottom Layer w6: U6.7@4429.21,3315.28 4429.21,3338.91 4453.64,3363.34 4453.64,3413.34 4470.3,3430 4523.33,3430 4526.33,3427 4572.88,3427 4667.51,3521.63 4832.81,3521.63 4866.72,3555.54 5001.42,3555.54 5031.23,3585.35 5095.07,3585.35 5109.78,3600.07 5176.25,3600.07 5188.72,3612.53 5255.18,3612.53 5265.58,3622.94 5954.54,3622.94 5990.47,3587 6081.44,3587 6112.64,3618.2 U5.5@6112.64,3659.68
LED_3_R: U5.3 U6.6 | length 1830.4
  Bottom Layer w6: U6.6@4409.53,3315.28 4409.53,3336.2 4441.64,3368.31 4441.64,3418.31 4465.33,3442 4528.3,3442 4531.3,3439 4567.91,3439 4662.54,3533.63 4827.84,3533.63 4861.75,3567.54 4996.45,3567.54 5026.26,3597.35 5090.1,3597.35 5104.81,3612.07 5171.28,3612.07 5183.74,3624.53 5250.21,3624.53 5260.61,3634.94 6034.94,3634.94 6044.13,3644.13 U5.3@6044.13,3659.68
LED_4_B: U4.1 U7.3 | length 515.1
  Top Layer w6: v1(4025,3085) v1(4080,3085)
  Bottom Layer w6: U4.1@3966.5,3104.52 3986.03,3085 v1(4025,3085) ; v1(4080,3085) 4080,3030 4145,2965 4186.62,2965 4237.39,3015.76 4255.76,3015.76 4291.99,3051.99 4327.75,3051.99 4330.47,3049.27 U7.3@4330.47,3025.28
LED_4_G: U4.5 U7.2 | length 709.8
  Bottom Layer w6: U4.5@3896.07,3213.93 3932.14,3250 4040,3250 4053,3237 4053,3231.7 4070.49,3214.21 4070.49,3138.51 4058,3126.02 4058,3033.97 4139.97,2952 4190.59,2952 4242.36,3003.76 4289.28,3003.76 U7.2@4310.79,3025.28
LED_4_R: U4.3 U7.1 | length 591.2
  Bottom Layer w6: U4.3@3944.51,3165.49 3944.51,3172.26 3970.74,3198.49 4021.51,3198.49 4058.49,3161.51 4058.49,3143.48 4046,3130.99 4046,3029 4135,2940 4195.56,2940 4245.41,2989.84 U7.1@4295.04,2989.84
LED_5_B: U1.1 U7.6 | length 851.8
  Top Layer w6: v1(4685,3060) 4725,3100 v1(4725,3170)
  Bottom Layer w6: U7.6@4389.53,3025.28 4389.53,3038.07 4403.45,3051.99 4676.99,3051.99 v1(4685,3060) ; v1@4720,3175 4709.51,3185.49 4709.51,3236.49 4796.51,3323.49 4881.51,3323.49 4920,3285 4920,3240 4897.83,3217.83 U1.1@4894.64,3217.83
LED_5_G: U1.5 U7.5 | length 473.5
  Bottom Layer w6: U7.5@4369.84,3025.28 4369.84,3038.07 4396.77,3065 4651.97,3065 4667.97,3081 4701,3081 4767.4,3147.4 U1.5@4785.23,3147.4
LED_5_R: U1.3 U7.4 | length 743.7
  Bottom Layer w6: U7.4@4350.16,3025.28 4350.16,3038.07 4389.08,3077 4647,3077 4663,3093 4696.03,3093 4755,3151.97 4755,3190.57 4721.51,3224.06 4721.51,3231.52 4759.99,3270 4805,3270 4825,3250 4825,3204.51 U1.3@4833.67,3195.84
LED_PWM: FPC_MCU.11 FPC_PWR.13 P1.5 U6.13 U7.13 | length 7415.7
  Top Layer w6: v1(1600,3335) P1.5@1555,3335 1555,3336.61 1535,3356.61 1535,3392.79 1697.21,3555 v1(1965,3555) ; v1(2110,3505) 2125,3490 2228,3490 2260,3522 3593.15,3522 3656.15,3459 3857.06,3459 4188.06,3128 4283,3128 4335,3180 v1(4355,3180) 4370,3180 4399.72,3150.28 4520.31,3150.28 4600,3070.58 4600,2965 v1(4610,2955)
  Bottom Layer w6: v1(1600,3335) 1683.19,3251.81 FPC_PWR.13@1694.17,3251.81 ; v1(1965,3555) 1985,3535 2080,3535 v1(2110,3505) ; U7.13@4350.16,2934.72 4350.16,2904.84 4390,2865 4530,2865 4610,2945 v1(4610,2955) ; v1(4355,3180) 4368.84,3180 ; U6.13@4370.16,3224.72 4368.84,3223.41 4368.84,3180 ; FPC_MCU.11@7040.83,3251.81 7008.19,3251.81 6995,3265 6995,3425 6825,3595 6106.41,3595 6086.41,3575 5985.5,3575 5949.57,3610.94 5270.56,3610.94 5260.15,3600.53 5193.69,3600.53 5181.22,3588.07 5114.75,3588.07 5100.04,3573.35 5038.35,3573.35 5005,3540 4868.15,3540 4837.78,3509.63 4672.48,3509.63 4577.85,3415 4521.36,3415 4518.36,3418 4516.74,3418 4496,3397.26 4496,3376.42 4503,3369.42 4503,3218 4449,3164 4376,3164 4368.84,3171.16 4368.84,3180
LED_SS: FPC_MCU.17 FPC_PWR.7 P1.2 U6.12 U7.12 | length 7509.5
  Top Layer w6: v1(1475,3235) P1.2@1505,3235 1455,3285 1455,3405 1485,3435 1543.03,3435 1708.03,3600 2010,3600 2023.03,3586.97 v1(2030,3586.97) ; v1(2195,3520) 2209,3534 3598.12,3534 3661.12,3471 3862.03,3471 4193.03,3140 4276.97,3140 4346.97,3210 4375,3210 v1(4389.84,3195.16) 4389.84,3181.43 4409,3162.28 4467.28,3162.28 4496.28,3191.28 ; v1(4550.28,3225.28) 4530.28,3225.28 4496.28,3191.28 ; v1(4630,2990) 4614,3006 4614,3073.55 4496.28,3191.28
  Bottom Layer w6: v1(1475,3235) 1585,3235 1640,3180 1693.23,3180 FPC_PWR.7@1694.17,3180.94 ; v1(2030,3586.97) 2113.03,3586.97 2180,3520 v1(2195,3520) ; U7.12@4369.84,2934.72 4369.84,2910.16 4400,2880 4505,2880 4615,2990 v1(4630,2990) ; v1@4550,3225 4539,3236 4539,3325.24 4687.39,3473.63 4852.69,3473.63 4883.06,3504 5024,3504 5057.35,3537.35 5114.95,3537.35 5129.66,3552.07 5196.13,3552.07 5208.6,3564.53 5275.06,3564.53 5285.47,3574.94 5934.65,3574.94 5970.59,3539 6101.32,3539 6121.32,3559 6810.09,3559 6959,3410.09 6959,3246 7024.06,3180.94 FPC_MCU.17@7040.83,3180.94
LH_DIODE_ARRAY: D1.1 FPC_MCU.19 FPC_PWR.5 | length 6347.2
  Top Layer w6: v1(1730,3160) 1745,3175 1745,3430 1835.03,3520.03 2050.03,3520.03 2113,3583 3617,3583 3681,3519 3881.91,3519 4065.91,3335 4090,3335 4160,3405 D1.1@4219.25,3405 4244.25,3430 4443.14,3430 4487.15,3474.01 4524.31,3474.01 4531.3,3481 4689.03,3481 4700.06,3492.03 4813.09,3492.03 4855.06,3534 5020.06,3534 5055.06,3569 5250.94,3569 5258.94,3577 6998,3577 7120,3455 7120,3275 v1(7090,3245)
  Bottom Layer w6: FPC_PWR.5@1694.17,3157.32 v1@1727.32,3157.32 ; FPC_MCU.19@7040.83,3157.32 7067.32,3157.32 7090,3180 v1(7090,3245)
NetR1_1: R1.1 U1.2 | length 59.3
  Bottom Layer w6: R1.1@4846.64,3271.64 4852.6,3265.67 U1.2@4852.6,3214.77
NetR2_1: R2.1 U1.4 | length 48.1
  Bottom Layer w6: R2.1@4773.36,3201.64 4804.16,3170.84 U1.4@4804.16,3166.33
NetR3_1: R3.1 U1.6 | length 54.1
  Bottom Layer w6: R3.1@4743.36,3068.36 4745.18,3068.36 U1.6@4782.17,3105.36
NetR4_1: R4.1 U4.2 | length 54.3
  Bottom Layer w6: U4.2@3963.44,3146.56 3990.24,3173.36 R4.1@4006.64,3173.36
NetR5_1: R5.1 SB1.2 | length 65
  Top Layer w6: SB1.2@7256.61,3665.88 7300,3622.48 R5.1@7300,3618.9
NetR6_1: R6.1 U4.4 | length 63.5
  Bottom Layer w6: U4.4@3915,3195 3945,3225 R6.1@3966.1,3225
NetR7_1: R7.1 U4.6 | length 44.7
  Bottom Layer w6: R7.1@3821.64,3246.64 3851.28,3216.99 U4.6@3854.03,3216.99
NetR8_1: R8.1 U5.2 | length 75.7
  Bottom Layer w6: R8.1@5943.9,3665 5949.21,3659.68 U5.2@6017.36,3659.68
NetR9_1: R9.1 U5.4 | length 56.7
  Bottom Layer w6: R9.1@6068.9,3610 6085.87,3626.97 U5.4@6085.87,3659.68
NetR10_1: R10.1 U2.2 | length 1491.2
  Bottom Layer w5.91: 4798.91,2219.82 ccw(c5741.41,2487.32) 5810,1510
  Bottom Layer w6: U2.2@4748.86,2296.14 U2.2@4748.86,2316.85 4798.91,2266.8 4798.91,2219.82
  Bottom Layer w10: 5810,1510 R10.1@5826.1,1510
NetR11_1: R11.1 U5.6 | length 51.6
  Bottom Layer w6: U5.6@6144.53,3687.24 6156.77,3675 R11.1@6191.1,3675
NetR12_1: R12.1 U8.2 | length 48.2
  Bottom Layer w6: R12.1@4313.9,3425 4313.9,3461.22 U8.2@4322.36,3469.68
NetR13_1: R13.1 U8.4 | length 43.2
  Bottom Layer w6: R13.1@4385,3428.9 4390.87,3434.76 U8.4@4390.87,3469.68
NetR14_1: R14.1 U8.6 | length 58.2
  Bottom Layer w6: U8.6@4449.53,3497.24 4498.35,3497.24 R14.1@4505,3503.9
NetR15_2: R15.2 U9.2 | length 49.5
  Bottom Layer w6: R15.2@2593.9,3645 2608.58,3659.68 U9.2@2637.36,3659.68
NetR16_2: R16.2 U9.4 | length 41.9
  Bottom Layer w6: U9.4@2705.87,3659.68 2705.87,3625.24 R16.2@2711.1,3620
NetR17_2: R17.2 U9.6 | length 46.6
  Bottom Layer w6: U9.6@2764.53,3687.24 2793.86,3687.24 R17.2@2806.1,3675
NetU6_9: U6.9 U7.14 | length 911
  Top Layer w6: v1(4480,3260) 4570,3260 4595,3235 4595,3126.97 4655,3066.97 4655,3040 v1(4685,3010)
  Bottom Layer w6: U7.14@4330.47,2934.72 4330.47,2899.53 4380,2850 4545,2850 4685,2990 v1(4685,3010) ; U6.9@4444.96,3260.16 4479.84,3260.16 v1(4480,3260)
PA0: FPC_MCU.12 FPC_PWR.12 | length 6459.5
  Top Layer w6: v1(1715,3710) 1732.56,3727.56 v1(1777.44,3727.56) ; v1(6880,3450) 6975,3545 v1(6985,3545)
  Bottom Layer w5.91: 2256.55,3816.17 cw(c2631.3,-2517.73) 3955.69,3687.49 ccw(c4372.5,5227.5) 4784.67,3686.24 cw(c6109.06,-2518.98) 6483.81,3814.92 cw(c6275.81,420.96) 6926.67,3758.42 ; 2256.6,3816.18 ccw(c2464.6,422.21) 1777.44,3752.39 ; 1777.44,3752.39 cw(c2464.6,422.21) 1786.28,3754.2 ccw(c2464.6,422.21) 1777.44,3752.39
  Bottom Layer w6: v1(1715,3710) 1740,3685 1740,3448.03 1773,3415.03 1773,3262 FPC_PWR.12@1795,3240 ; v1(1777.44,3727.56) 1777.44,3752.39 ; v1(6880,3450) 6880,3390 6852,3362 6852,3291.03 6903.03,3240 FPC_MCU.12@6927.64,3240 ; 6926.67,3757.12 6995,3688.79 6995,3555 v1(6985,3545)
SPI_SCK: FPC_MCU.15 FPC_PWR.9 P1.4 U6.11 U7.11 | length 7523.2
  Top Layer w6: v1(1600,3260) 1545.36,3260 1520.36,3285 P1.4@1505,3285 1529.49,3309.49 1529.49,3345.14 1523,3351.64 1523,3398 1705,3580 1990,3580 2005,3565 v1(2005,3560) ; v1(2150,3520) 2150,3535 2161,3546 3603.09,3546 3666.09,3483 3867,3483 4195,3155 4275,3155 4345,3225 4405,3225 4430,3200 v1(4430,3185) 4436.25,3191.25 4457.31,3191.25 4514.06,3248 4562,3248 4580,3230 4580,3215 ; v1(4535.28,3190.28) 4555.28,3190.28 4580,3215 ; v1(4635,3025) 4635,3070 4580,3125 4580,3215
  Bottom Layer w6: v1(1600,3260) 1655.43,3204.57 FPC_PWR.9@1694.17,3204.57 ; v1(2005,3560) 2105,3560 2145,3520 v1(2150,3520) ; U7.11@4389.53,2934.72 4389.53,2910.47 4407.5,2892.5 4482.5,2892.5 4615,3025 v1(4635,3025) ; U6.11@4409.53,3224.72 4409.53,3210.47 4434.72,3185.28 4434.45,3185 v1(4430,3185) ; v1@4535,3190 4527,3198 4527,3379.36 4520,3386.36 4520,3387.32 4523.68,3391 4587.79,3391 4682.42,3485.63 4847.72,3485.63 4878.09,3516 5014.94,3516 5048.29,3549.35 5109.98,3549.35 5124.69,3564.07 5191.16,3564.07 5203.63,3576.53 5270.09,3576.53 5280.5,3586.94 5939.62,3586.94 5975.56,3551 6096.35,3551 6116.35,3571 6815.06,3571 6971,3415.06 6971,3255.06 7021.49,3204.57 FPC_MCU.15@7040.83,3204.57
SPI_SDIO: FPC_MCU.13 FPC_PWR.11 P1.3 U6.14 | length 6708.7
  Top Layer w6: P1.3@1555,3285 1580,3285 1827.03,3532.03 2042,3532.03 2104.97,3595 2864,3595 v1(2877,3608)
  Bottom Layer w6: v1(1600,3300) 1600,3298.03 1669.84,3228.19 FPC_PWR.11@1694.17,3228.19 ; v1(2877,3608) 2895,3590 3040,3590 3076,3626 3316.29,3626 3354.22,3588.07 3576.93,3588.07 3620,3545 3812.07,3545 3833.32,3523.74 3962.32,3523.74 3990.54,3495.52 4084.48,3495.52 4116,3464 4181,3464 4189,3456 4189,3271 4290,3170 4325,3170 ; U6.14@4350.47,3224.72 4350.47,3211.93 4325,3186.45 4325,3170 ; FPC_MCU.13@7040.83,3228.19 7014.84,3228.19 6983,3260.03 6983,3420.03 6820.03,3583 6111.38,3583 6091.38,3563 5980.53,3563 5944.6,3598.94 5275.53,3598.94 5265.12,3588.53 5198.66,3588.53 5186.19,3576.07 5119.72,3576.07 5105.01,3561.35 5043.32,3561.35 5009.97,3528 4873.12,3528 4842.75,3497.63 4677.45,3497.63 4582.82,3403 4518.71,3403 4508,3392.29 4508,3381.39 4515,3374.39 4515,3199.7 4467.3,3152 4343,3152 4325,3170
TP_NOSE: FPC_MCU.20 FPC_PWR.4 U3.4 | length 10106.2
  Top Layer w6: v1(1735,3120) 1750,3120 1760,3130 1760,3428.03 1840,3508.03 2055,3508.03 2116.97,3570 3613.03,3570 3676.03,3507 3876.94,3507 4111.94,3272 4410.03,3272 4455.03,3317 4542,3317 4705.03,3480.03 4818.06,3480.03 4860.03,3522 5025.03,3522 5060.03,3557 5255.91,3557 5263.91,3565 6794.7,3565 6855,3504.7 v1(6855,3480) ; U3.4@3940,2405 U3.4@3953.3,2405
  Bottom Layer w3.94: 1770.94,2585.36 1948.38,1965.88
  Bottom Layer w5.91: 1948.38,1965.88 ccw(c2403.14,2127.35) 2180.49,1699.21 ccw(c2883.53,2941.23) 3429.76,1622.7 ccw(c3042.58,2431.03) 3900,2170
  Bottom Layer w6: v1(1735,3120) 1770.94,3084.06 ; 1770.94,2585.36 1770.94,3084.06 ; FPC_PWR.4@1807.36,3145.51 1800.34,3145.51 1770.94,3116.11 1770.94,3084.06 ; 3902.38,2172.38 3902.38,2367.38 3940,2405 U3.4@3953.3,2405 ; v1(6855,3480) 6855,3398.03 6840,3383.03 6840,3286.06 6905,3221.06 6905,3161.13 6920.62,3145.51 FPC_MCU.20@6927.64,3145.51
TP_NOSE_GND: FPC_MCU.22 FPC_PWR.2 U3.2 | length 9735.4
  Top Layer w6: v1(1855,3120) 1870,3135 1870,3400 1965,3495 2058.94,3495 2121.94,3558 3608.06,3558 3671.06,3495 3871.97,3495 4106.97,3260 4415,3260 4460,3305 4550,3305 4713.03,3468.03 4823.03,3468.03 4865,3510 5030,3510 5065,3545 5260.88,3545 5268.88,3553 6789.73,3553 6825,3517.73 v1(6825,3505)
  Bottom Layer w3.94: 1790.45,2606.15 1966.46,1991.66
  Bottom Layer w5.91: 1968.19,1992.16 ccw(c2422.95,2153.63) 2200.29,1725.49 ccw(c2888.22,2873.05) 3086.28,1549.83 ccw(c2843.53,2956.23) 3389.76,1637.7 ccw(c3002.58,2446.03) 3860,2185.01
  Bottom Layer w6: 1790.45,2606.15 1790.45,3104.98 FPC_PWR.2@1807.36,3121.89 1853.11,3121.89 v1(1855,3120) ; 1966.46,1991.66 1967.69,1991.66 ; 3860,2185.01 3860,2348.3 U3.2@3866.7,2355 ; v1(6825,3505) 6825,3284.09 6890,3219.09 6890,3152.51 6920.62,3121.89 FPC_MCU.22@6927.64,3121.89
VBAT: C1.1 C2.1 FPC_MCU.21 FPC_MCU.23 FPC_PWR.1 FPC_PWR.3 P1.1 U6.10 U6.16 U7.10 U7.16 | length 7293.9
  Top Layer w10: P1.1@1555,3235 1635,3155 v1(1635,3110) 1640,3110 1675,3075 1765,3075 1785,3095 1785,3375 v1(1835,3425) ; v1(1917.5,3412.5) 1975,3470 2245,3470 2283,3508 3577,3508 3645,3440 3847.53,3440 4182.53,3105 v1(4200,3105) 4200,3030 v1(4280,2950) 4295.28,2934.72 v1(4439.72,2934.72) ; v1(4195,3185) 4240,3230 v1(4280,3230) 4289,3239 4446,3239 4450,3235 ; v1(4460,3225) 4450,3235 ; v1(6985,3110) 6930,3165 6930,3255 6700,3485 5100,3485 5065,3450 4905,3450 4865,3410 4740,3410 4690,3360 4690,3310 4665,3285 4465,3285 4450,3270 4450,3235
  Bottom Layer w6: v1(4280,2950) 4276.1,2953.9 C1.1@4245,2953.9 4261.26,2970.16 U7.16@4295.04,2970.16 ; v1(4280,3230) 4265,3245 C2.1@4265,3256.1 4269.06,3260.16 U6.16@4315.04,3260.16 ; U7.10@4409.21,2934.72 v1(4439.72,2934.72) ; U6.10@4429.21,3224.72 v1@4459.72,3224.72
  Bottom Layer w10: v1(1635,3110) 1646.89,3121.89 1694.17,3121.89 ; FPC_PWR.1@1694.17,3110.08 1694.17,3121.89 ; FPC_PWR.3@1694.17,3133.7 1694.17,3121.89 ; v1(1835,3425) 1847.5,3412.5 v1(1917.5,3412.5) ; v1(4195,3185) 4195,3145 4200,3140 v1(4200,3105) ; v1(6985,3110) 6995,3120 7040.83,3120 ; FPC_MCU.23@7040.83,3110.08 7040.83,3120 ; FPC_MCU.21@7040.83,3133.7 7040.83,3120
pads on no net: FPC_MCU.MP1 FPC_MCU.MP2 FPC_PWR.MP1 FPC_PWR.MP2 P1.HOLE U3.1 U3.3 U6.17 U7.7 U7.9 U7.17

## Polygon pours and split planes (outlines as drawn)
no net on Keep-Out Layer "hole1" (none, remove dead copper): 3884.07,2506.78 3863.33,2497.88 3844.66,2485.2 3828.75,2469.2 3816.17,2450.47 3807.38,2429.68 3802.7,2407.61 3798.56,2371.09 3799.89,2335.69 3823.59,2211.12 3825.13,2177.75 3795.82,2109.56 3767.07,2050.99 3736.52,1996.99 3704.14,1947.32 3669.97,1901.77 3635.82,1861.99 3599.21,1824.34 3556.07,1785.4 3515.6,1753.43 3472.6,1723.66 3427.4,1696.34 3380.4,1671.74 3326.61,1647.87 3274.67,1628.76 3220.59,1612.45 3164.03,1598.92 3105.72,1588.45 3044.57,1580.94 2980.61,1576.55 2912.06,1575.41 2840.93,1577.72 2766.55,1583.62 2690.62,1593.02 2613.5,1605.94 2537,1622.1 2488.84,1634.03 2441.1,1647.39 2373.81,1669.29 2314.52,1692.18 2262.13,1716.08 2217.74,1740.15 2194.79,1754.39 2172.56,1769.65 2139.45,1795.89 2111.6,1822.3 2083.68,1853.9 2058.82,1887.93 2044.02,1911.78 2030.53,1936.27 2009.57,1980.21 1987.32,2035.15 1961.34,2109.56 1927.26,2218.97 1892.87,2342.18 1878.24,2399.73 1865.03,2457.61 1849.92,2536.86 1838.48,2616.67 1832.58,2673.86 1828.34,2731.39 1825.47,2808.21 1825.43,2840.48 1826.37,2872.68 1830.62,2923.91 1834.75,2951.82 1840.16,2979.46 1850.9,3023.18 1861.01,3058.58 1872.9,3093.63 1890.17,3134.7 1910.31,3172.86 1933.07,3207.82 1956.12,3237.06 1984.57,3267.05 2015.84,3294.27 2036.99,3310 2058.92,3324.48 2097.11,3346.16 2139.82,3366.27 2188.49,3385.04 2238.41,3400.47 2271.31,3408.85 2304.4,3416.08 2370.12,3427.39 2443.76,3436.17 2526.03,3442.04 2584.52,3444.24 2643.09,3445.23 2736.94,3445.15 2822.86,3444.17 2908.7,3441.15 2994.16,3435.08 3070.15,3426.71 3145.89,3415.53 3241.49,3397.73 3333.51,3377.13 3424.86,3353.67 3518.01,3326.76 3610.06,3296.66 3653.79,3280.85 3697.1,3263.94 3758.07,3237.41 3808.89,3211.76 3845.35,3189.78 3868.42,3173.36 3890.18,3155.06 3911.21,3133.13 3929.27,3108.89 3943.16,3084.38 3954.5,3058.45 3966.58,3022.47 3977.34,2981.49 3985.77,2940.14 3993.46,2885.07 3997.09,2832.07 3996.92,2779.07 3993.2,2731.24 3986.33,2683.78 3974.08,2624.68 3956.79,2559.59 3939.52,2537.96 3917.68,2520.94 3892.48,2509.47
no net on Keep-Out Layer "hole2" (none, remove dead copper): 4911.65,2186.12 4911.74,2186.59 4940.11,2335.69 4941.44,2371.09 4937.3,2407.61 4932.62,2429.68 4923.83,2450.47 4911.25,2469.2 4895.34,2485.2 4876.67,2497.88 4855.93,2506.78 4847.52,2509.47 4822.32,2520.94 4800.48,2537.96 4783.21,2559.59 4765.92,2624.68 4753.67,2683.78 4746.8,2731.24 4743.07,2779.07 4742.9,2832.07 4746.54,2885.07 4754.23,2940.14 4762.66,2981.49 4773.41,3022.47 4785.5,3058.45 4796.84,3084.38 4810.73,3108.89 4828.79,3133.13 4849.82,3155.06 4871.58,3173.36 4894.65,3189.78 4931.11,3211.76 4981.93,3237.41 5042.9,3263.94 5086.21,3280.85 5129.94,3296.66 5221.99,3326.76 5315.14,3353.67 5406.49,3377.13 5498.51,3397.73 5594.11,3415.53 5669.84,3426.72 5745.84,3435.08 5831.3,3441.15 5917.14,3444.18 6003.06,3445.15 6096.91,3445.23 6155.48,3444.24 6213.97,3442.04 6296.23,3436.17 6369.88,3427.39 6435.6,3416.08 6468.68,3408.85 6501.59,3400.47 6551.51,3385.04 6600.17,3366.27 6642.89,3346.16 6681.08,3324.49 6703,3310.01 6724.16,3294.27 6755.43,3267.05 6783.87,3237.06 6806.93,3207.82 6829.69,3172.86 6849.83,3134.7 6867.09,3093.63 6878.99,3058.58 6889.1,3023.18 6899.84,2979.46 6905.25,2951.82 6909.38,2923.91 6913.62,2872.68 6914.56,2840.48 6914.53,2808.21 6911.65,2731.39 6907.42,2673.87 6901.52,2616.67 6890.08,2536.86 6874.97,2457.61 6861.75,2399.73 6847.13,2342.18 6812.74,2218.97 6778.65,2109.56 6752.68,2035.16 6730.43,1980.21 6709.47,1936.27 6695.98,1911.78 6681.18,1887.93 6656.32,1853.9 6628.4,1822.3 6600.55,1795.89 6567.44,1769.66 6545.21,1754.39 6522.26,1740.15 6477.87,1716.08 6425.47,1692.18 6366.19,1669.3 6298.9,1647.39 6251.16,1634.03 6203,1622.1 6126.5,1605.94 6049.38,1593.02 5973.45,1583.62 5899.06,1577.72 5827.94,1575.41 5759.39,1576.55 5695.43,1580.94 5634.28,1588.45 5575.97,1598.92 5519.41,1612.45 5465.33,1628.76 5413.39,1647.87 5359.6,1671.74 5312.6,1696.34 5267.4,1723.66 5224.4,1753.43 5183.93,1785.4 5140.79,1824.34 5104.18,1861.99 5070.03,1901.77 5035.86,1947.32 5003.48,1996.99 4972.93,2050.99 4944.18,2109.56 4914.87,2177.75
no net on Keep-Out Layer "hol3" (none, remove dead copper): 4370,3511.01 4178.27,3532.52 3987.42,3560.74 3797.67,3595.64 3640.57,3625.07 3482.7,3650 3324.19,3670.43 3165.16,3686.32 3005.73,3697.68 2846.05,3704.49 2686.24,3706.74 2526.43,3704.44 2366.75,3697.58 2207.33,3686.17 2048.31,3670.23 1889.8,3649.75 1879.52,3649.36 1869.38,3651.12 1859.83,3654.94 1851.28,3660.67 1844.11,3668.05 1838.63,3676.76 1835.08,3686.41 1833.62,3696.6 1834.31,3706.86 1837.11,3716.76 1841.91,3725.86 1848.5,3733.76 1856.59,3740.12 1865.82,3744.66 1875.8,3747.18 2037.09,3768.01 2198.91,3784.24 2361.13,3795.85 2523.61,3802.82 2686.23,3805.17 2848.84,3802.88 3011.33,3795.95 3173.55,3784.39 3335.37,3768.21 3496.67,3747.43 3657.31,3722.06 3817.16,3692.11 4000.46,3658.35 4184.81,3630.93 4370,3609.88 4555.19,3630.93 4739.54,3658.35 4922.83,3692.11 5082.69,3722.06 5243.33,3747.43 5404.62,3768.21 5566.45,3784.39 5728.67,3795.95 5891.16,3802.88 6053.77,3805.17 6216.39,3802.82 6378.87,3795.85 6541.09,3784.24 6702.91,3768.01 6864.2,3747.18 6874.18,3744.66 6883.41,3740.12 6891.5,3733.76 6898.09,3725.86 6902.89,3716.76 6905.69,3706.86 6906.38,3696.6 6904.92,3686.41 6901.37,3676.76 6895.89,3668.05 6888.72,3660.67 6880.17,3654.94 6870.62,3651.12 6860.48,3649.36 6850.2,3649.75 6691.69,3670.23 6532.66,3686.18 6373.25,3697.58 6213.57,3704.44 6053.76,3706.74 5893.95,3704.49 5734.27,3697.68 5574.84,3686.32 5415.81,3670.43 5257.29,3650 5099.43,3625.07 4942.33,3595.64 4752.58,3560.74 4561.73,3532.52
no net on Keep-Out Layer "hol4" (none, remove dead copper): 1601.46,3632.05 1607.73,3631.55 1613.86,3630.06 1619.66,3627.62 1625.01,3624.29 1629.77,3620.16 1633.82,3615.34 1637.05,3609.93 1639.39,3604.08 1640.77,3597.94 1641.17,3591.65 1640.57,3585.38 1638.99,3579.28 1636.46,3573.51 1633.06,3568.21 1628.86,3563.52 1623.97,3559.54 1618.51,3556.39 1612.63,3554.14 1606.46,3552.85 1600.17,3552.55 1593.91,3553.24 1587.84,3554.91 1582.11,3557.53 1576.86,3561.01 1572.23,3565.28 1568.33,3570.23 1565.26,3575.73 1563.1,3581.65 1561.9,3587.83 1561.69,3594.13 1562.48,3600.38 1564.24,3606.42 1566.94,3612.12 1570.51,3617.31 1574.85,3621.88 1579.85,3625.7 1585.4,3628.69 1591.35,3630.76 1594.89,3631.52 1598.49,3631.95 1599.81,3632.02 1600.63,3632.05
no net on Keep-Out Layer "hol5" (none, remove dead copper): 1602.53,2923.81 1608.81,2923.31 1614.93,2921.83 1620.74,2919.39 1626.09,2916.07 1630.85,2911.95 1634.9,2907.13 1638.14,2901.72 1640.49,2895.88 1641.88,2889.73 1642.28,2883.45 1641.69,2877.18 1640.11,2871.08 1637.59,2865.3 1634.19,2860 1630,2855.3 1625.11,2851.32 1619.66,2848.17 1613.78,2845.91 1607.62,2844.61 1601.33,2844.3 1595.07,2844.99 1588.99,2846.66 1583.26,2849.26 1578,2852.74 1573.37,2857.01 1569.46,2861.95 1566.39,2867.45 1564.22,2873.36 1563.02,2879.55 1562.8,2885.84 1563.58,2892.09 1565.34,2898.14 1568.03,2903.84 1571.59,2909.03 1575.92,2913.61 1580.93,2917.43 1586.47,2920.43 1592.42,2922.51 1595.98,2923.27 1599.61,2923.7 1600.9,2923.78 1601.71,2923.8
no net on Keep-Out Layer "hol6" (none, remove dead copper): 7138.42,3552.53 7132.15,3553.05 7126.03,3554.56 7120.23,3557.02 7114.89,3560.36 7110.14,3564.5 7106.11,3569.34 7102.9,3574.76 7100.57,3580.62 7099.21,3586.76 7098.83,3593.05 7099.45,3599.32 7101.05,3605.41 7103.59,3611.18 7107.02,3616.47 7111.23,3621.15 7116.13,3625.11 7121.59,3628.24 7127.48,3630.47 7133.65,3631.75 7137.57,3632.04 7141.51,3631.95 7147.73,3630.99 7153.73,3629.06 7159.34,3626.21 7164.44,3622.5 7168.89,3618.04 7172.57,3612.93 7175.41,3607.31 7177.31,3601.3 7178.25,3595.08 7178.19,3588.78 7177.14,3582.57 7175.12,3576.6 7172.19,3571.03 7168.41,3565.99 7163.88,3561.61 7158.72,3558 7153.05,3555.25 7147.02,3553.43 7142.74,3552.74